# EAGLE board PCB_2D (EAGLE 9.7.0)
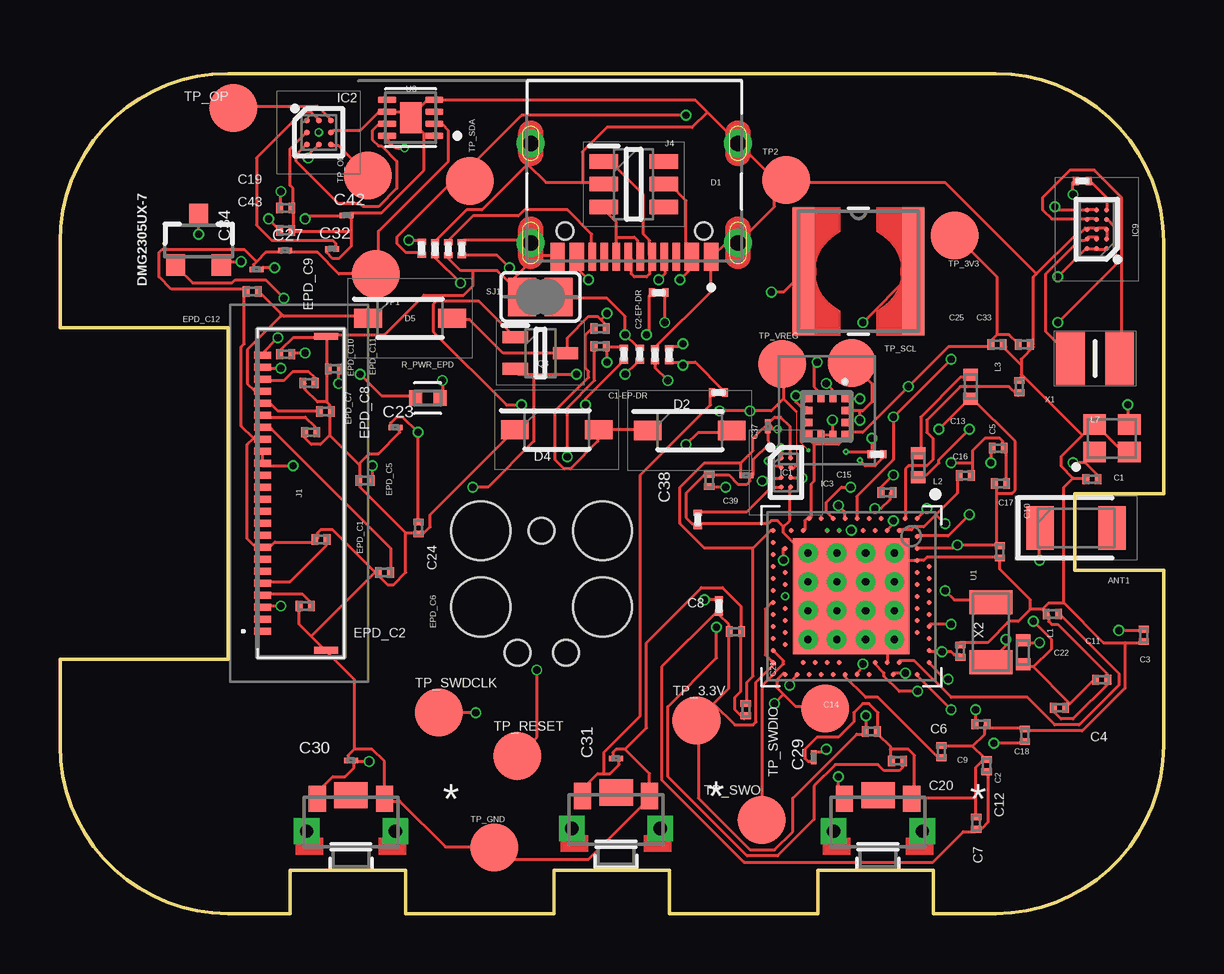
[diagram p0: board, top side]
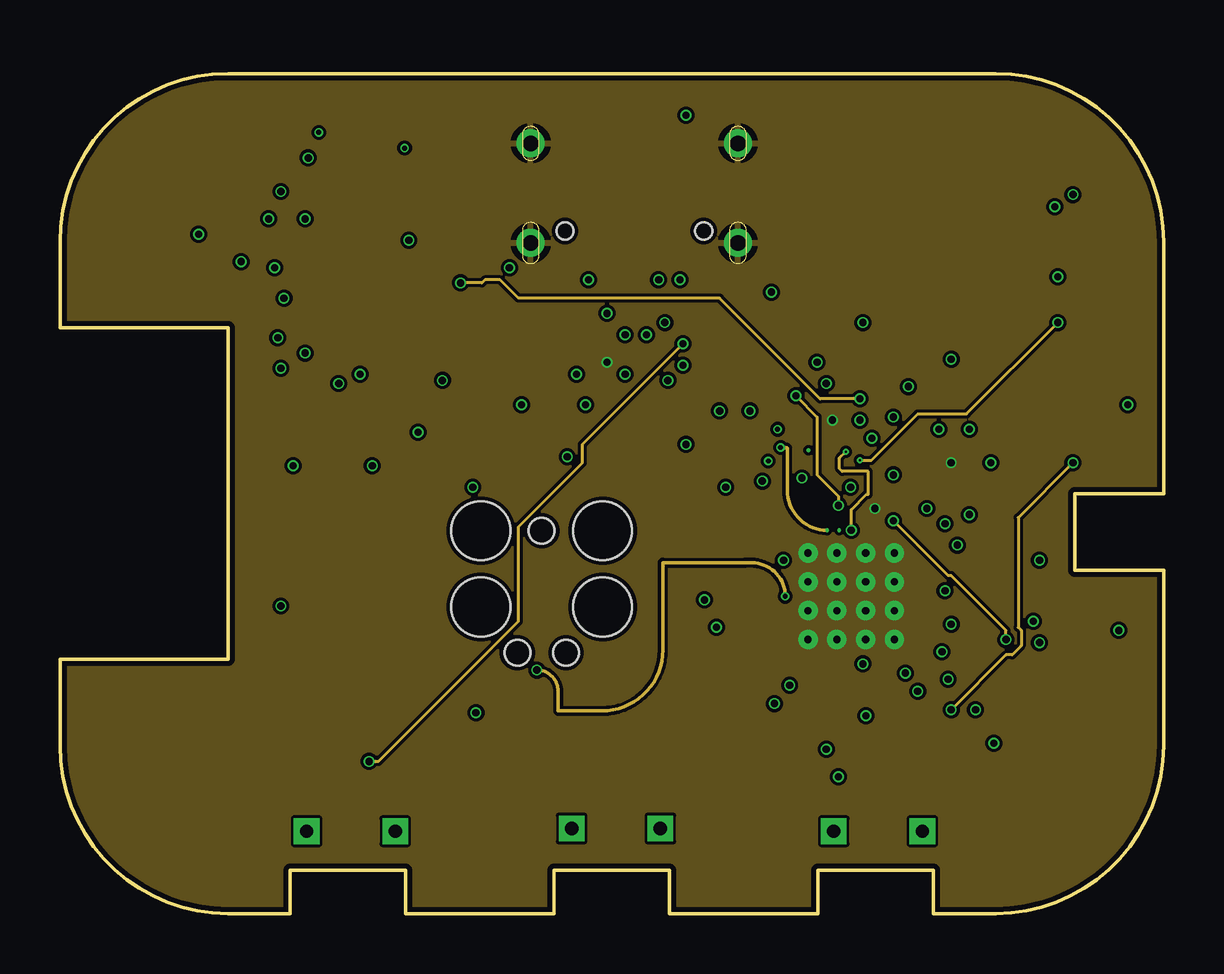
[diagram p1: board, inner layer Route2]
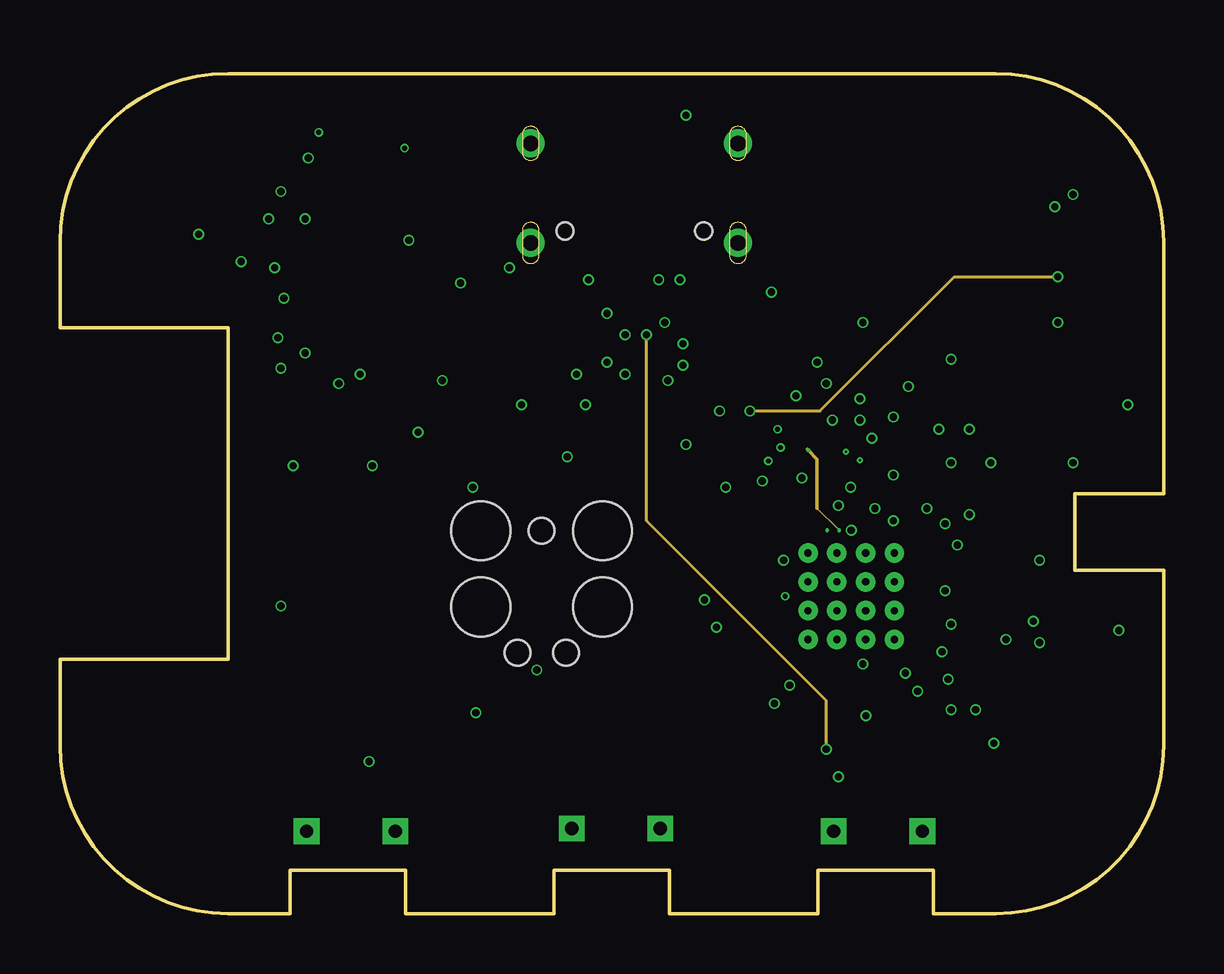
[diagram p2: board, inner layer Route15]
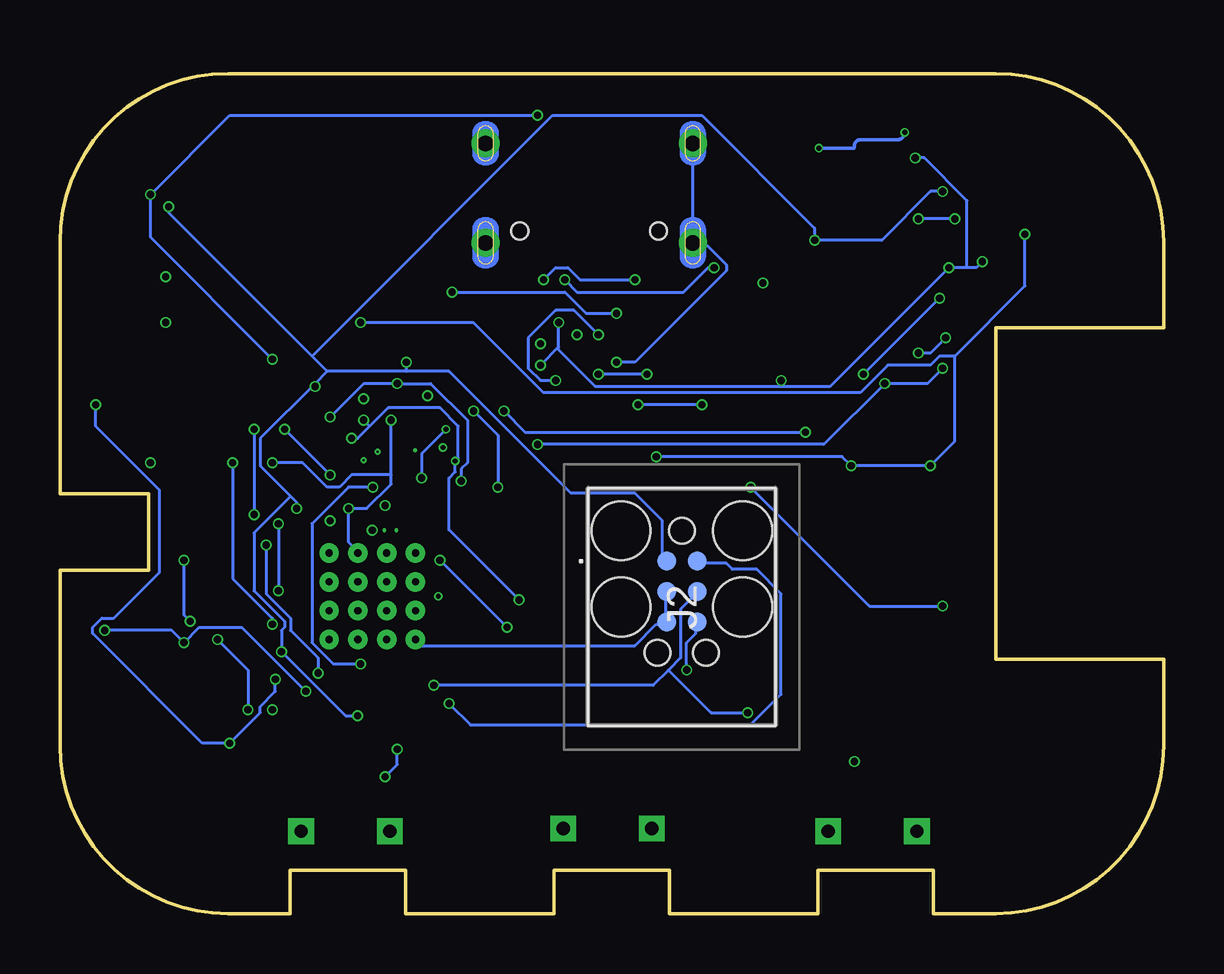
[diagram p3: board, bottom side, seen from below]

Size 46 x 35 mm. Coordinates in mm from the lower left corner, seen from the top.
Outline: 39,0 36.4,0 36.4,1.8 31.6,1.8 31.6,0 25.4,0 25.4,1.8 20.6,1.8 20.6,0 14.4,0 14.4,1.8 9.6,1.8 9.6,0 7,0 arc-90 0,7 0,10.6 7,10.6 7,24.4 0,24.4 0,28 arc-90 7,35 39,35 arc-90 46,28 46,17.5 42.31,17.5 42.31,14.3 46,14.3 46,7 arc-90 39,0
Copper layers (1+2*15+16): Top 0.035mm / dielectric 1.6mm / Route2 0.035mm / dielectric 0.15mm / Route15 0.035mm / dielectric 0.2mm / Bottom 0.035mm
Design rules "jlcpcb-2layers.dru *": minimum track width 5mil, minimum drill 0.3mm, track to track 5mil, track to pad 5mil, pad to pad 5mil, via to via 5mil, smd to smd 5mil, copper to edge 0.2mm, drill to drill 6mil, minimum pad ring 10mil, minimum via ring 3mil, stop-mask expansion 4mil, vias tented up to drill 0mil, thermal gap 10mil

## Footprints (pad centres in the part's own frame; a part is rotated, then mirrored left to right if it is on the bottom)
2450AT18B100E_ANTC3216X140N = smd 1.15 x 1.8: 1 -1.5,0; 2 1.5,0
NORDIC_NRF_3_RESC0201_L = smd 0.28 x 0.43: 1 -0.255,0; 2 0.255,0
GRM011R60J152KE01L_2_CAPC0201X13N = smd 0.22 x 0.23: 1 -0.185,0; 2 0.185,0
ESP32_C6_LIBRARY_3_SOT95P280X145-6N = smd 1.2 x 0.6: 1 -1.25,0.95; 2 -1.25,0; 3 -1.25,-0.95; 4 1.25,-0.95; 5 1.25,0; 6 1.25,0.95
ESP32_C6_LIBRARY_5_SOD3716X135N = smd 1.15 x 0.8: 1 -1.75,0; 2 1.75,0
ESP32_C6_LIBRARY_4_ESP32_C6_LIBRARY_4_ESP32_C6_LIBRARY_4_ESP32_C6_LIBRARY_4_ESP32_WROVER_SPARKFUN-DISCRETESEMI_SOT23-3 = smd 0.8 x 0.9: 1 -0.95,-1; 2 0.95,-1; 3 0,1.1
BQ25180YBGR_BGA8C40P2X4_100X155X50 = smd 0.2 x 0.2: A1 -0.2,0.6; A2 0.2,0.6; B1 -0.2,0.2; B2 0.2,0.2; C1 -0.2,-0.2; C2 0.2,-0.2; D1 -0.2,-0.6; D2 0.2,-0.6
DRV2605YZFR_BGA9C50P3X3_144X144X62 = smd 0.25 x 0.25: A1 -0.5,0.5; A2 0,0.5; A3 0.5,0.5; B1 -0.5,0; B2 0,0; B3 0.5,0; C1 -0.5,-0.5; C2 0,-0.5; C3 0.5,-0.5
BMA423_BMA423 = smd 0.3 x 0.35: 1 -0.75,-0.775; 2 -0.25,-0.775; 3 0.25,-0.775; 4 0.75,-0.775; 7 0.75,0.775; 8 0.25,0.775; 9 -0.25,0.775; 10 -0.75,0.775 | smd 0.35 x 0.3: 5 0.775,-0.25; 6 0.775,0.25; 11 -0.775,0.25; 12 -0.775,-0.25
RT6160AWSC_BGA15C40P3X5_140X230X60 = smd 0.216 x 0.216: A1 -0.4,0.8; A2 0,0.8; A3 0.4,0.8; B1 -0.4,0.4; B2 0,0.4; B3 0.4,0.4; C1 -0.4,0; C2 0,0; C3 0.4,0; D1 -0.4,-0.4; D2 0,-0.4; D3 0.4,-0.4; E1 -0.4,-0.8; E2 0,-0.8; E3 0.4,-0.8
503480-2400_5034802400 = smd 0.3 x 0.7: 1 -5.75,1.525; 2 -5.25,1.525; 3 -4.75,1.525; 4 -4.25,1.525; 5 -3.75,1.525; 6 -3.25,1.525; 7 -2.75,1.525; 8 -2.25,1.525; 9 -1.75,1.525; 10 -1.25,1.525; 11 -0.75,1.525; 12 -0.25,1.525; 13 0.25,1.525; 14 0.75,1.525; 15 1.25,1.525; 16 1.75,1.525; 17 2.25,1.525; 18 2.75,1.525; 19 3.25,1.525; 20 3.75,1.525; 21 4.25,1.525; 22 4.75,1.525; 23 5.25,1.525; 24 5.75,1.525 | smd 0.3 x 1: MP1 -6.54,-1.125; MP2 6.54,-1.125
TC2030-IDC_TC2030IDC = smd 0.783 x 0.783: 1 -0.953,-0.635; 2 -0.953,0.635; 3 0.317,-0.635; 4 0.317,0.635; 5 1.588,-0.635; 6 1.588,0.635 | hole 2.451: -2.223,-2.54; -2.223,2.54; 0.952,-2.54; 0.952,2.54 | hole 1.067: -2.223,0; 2.857,-1.016; 2.857,1.016
KH-TYPE-C-16P_KINGHELM_KH-TYPE-C-16P = smd 0.6 x 1.15: A1_B12 -3.2,4.725; A4_B9 -2.4,4.725; A9_B4 2.4,4.725; A12_B1 3.2,4.725 | smd 0.3 x 1.15: A5 -1.25,4.725; A6 -0.25,4.725; A7 0.25,4.725; A8 1.25,4.725; B5 1.75,4.725; B6 0.75,4.725; B7 -0.75,4.725; B8 -1.75,4.725 | drill 0.65 pad 1.05: SH1 -4.32,0; SH2 4.32,0; SH3 -4.32,4.15; SH4 4.32,4.15 | hole 0.7: -2.89,3.65; 2.89,3.65
NORDIC_NRF_2_RESC0402_L = smd 0.5 x 0.6: 1 -0.5,0; 2 0.5,0
ESP32_C6_LIBRARY_2_IND_4828-WE-TPC_WRE = smd 0.9 x 5.3: 1 -2.286,0; 2 2.286,0
MLP2016SR47MT0S1_INDC2016X100N = smd 1.2 x 2.2: 1 -1.028,0; 2 1.028,0
ESP32_C6_LIBRARY_6_SOT65P210X110-3N = smd 1.05 x 0.5: 1 -1.05,0.65; 2 -1.05,-0.65; 3 1.05,0
CPF0201D7K68C1_0201 = smd 0.35 x 0.25: 1 0,0.275; 2 0,-0.275
RESC1005X40 = smd 0.535 x 0.644: 1 -0.507,0; 2 0.507,0
ESP32_C6_LIBRARY_7_JUMPER_SJ = smd 1.168 x 1.6: 1 -0.762,0; 2 0.762,0
2025-10-22_07-23-44_LIBRARY_SW_EVP-AKE31A_PAN = smd 0.711 x 1.092: 1 -1.4,-0.972; 2 1.4,-0.972 | drill 0.559 pad 0.914 square: 3 -1.848,0.381; 4 1.848,0.381 | smd 1.397 x 1.092: 5 0,-1.124
HECTOR_WATCH_1_TP20R = smd 2 x 2: TP 0,0
NORDIC_NRF_4_AQFN50P700X700X85_HS-74N = smd 4.85 x 4.85: P$74 0,0 | drill 0.3 pad 0.6: P$75 -1.8,1.8; P$76 -0.6,1.8; P$77 0.6,1.8; P$78 1.8,1.8; P$79 -1.8,0.6; P$80 -0.6,0.6; P$81 0.6,0.6; P$82 1.8,0.6; P$83 -1.8,-0.6; P$84 -0.6,-0.6; P$85 0.6,-0.6; P$86 1.8,-0.6; P$87 -1.8,-1.8; P$88 -0.6,-1.8; P$89 0.6,-1.8; P$90 1.8,-1.8 | smd 0.2 x 0.2: P$A8 -1.25,3.25; P$A10 -0.75,3.25; P$A12 -0.25,3.25; P$A14 0.25,3.25; P$A16 0.75,3.25; P$A18 1.25,3.25; P$A20 1.75,3.25; P$A22 2.25,3.25; P$A23 2.75,3.25; P$AA24 3.25,-2.25; P$AB2 -2.75,-2.5; P$AC5 -2,-2.75; P$AC9 -1,-2.75; P$AC11 -0.5,-2.75; P$AC13 0,-2.75; P$AC15 0.5,-2.75; P$AC17 1,-2.75; P$AC19 1.5,-2.75; P$AC21 2,-2.75; P$AC24 3.25,-2.75; P$AD2 -2.75,-3.25; P$AD4 -2.25,-3.25; P$AD6 -1.75,-3.25; P$AD8 -1.25,-3.25; P$AD10 -0.75,-3.25; P$AD12 -0.25,-3.25; P$AD14 0.25,-3.25; P$AD16 0.75,-3.25; P$AD18 1.25,-3.25; P$AD20 1.75,-3.25; P$AD22 2.25,-3.25; P$AD23 2.75,-3.25; P$B1 -3.25,2.75; P$B3 -2.5,2.75; P$B5 -2,2.75; P$B7 -1.5,2.75; P$B9 -1,2.75; P$B11 -0.5,2.75; P$B13 0,2.75; P$B15 0.5,2.75; P$B17 1,2.75; P$B19 1.5,2.75; P$B24 3.25,2.75; P$C1 -3.25,2.25; P$D2 -2.75,2; P$D23 2.75,2; P$E24 3.25,1.75; P$F2 -2.75,1.5; P$F23 2.75,1.5; P$G1 -3.25,1.25; P$H2 -2.75,1; P$H23 2.75,1; P$J1 -3.25,0.75; P$J24 3.25,0.75; P$K2 -2.75,0.5; P$L1 -3.25,0.25; P$L24 3.25,0.25; P$M2 -2.75,0; P$N1 -3.25,-0.25; P$N24 3.25,-0.25; P$P2 -2.75,-0.5; P$P23 2.75,-0.5; P$R1 -3.25,-0.75; P$R24 3.25,-0.75; P$T2 -2.75,-1; P$T23 2.75,-1; P$U1 -3.25,-1.25; P$U24 3.25,-1.25; P$V23 2.75,-1.5; P$W1 -3.25,-1.75; P$W24 3.25,-1.75; P$Y2 -2.75,-2; P$Y23 2.75,-2
ESP32_C6_LIBRARY_SON50P200X200X80-9N = smd 0.76 x 0.27: 1 -0.985,0.75; 2 -0.985,0.25; 3 -0.985,-0.25; 4 -0.985,-0.75; 5 0.985,-0.75; 6 0.985,-0.25; 7 0.985,0.25; 8 0.985,0.75 | smd 0.9 x 1.3: 9 0,0
NORDIC_NRF_BT-XTAL_2016_N = smd 0.95 x 0.85: 1 -0.725,-0.575; 2 0.725,-0.575; 3 0.725,0.575; 4 -0.725,0.575
NORDIC_NRF_1_XTAL_3215_N = smd 1 x 1.8: 1 -1.25,0; 2 1.25,0

## Placement (x,y rotation side)
ANT1  2450AT18B100E  [2450AT18B100E_ANTC3216X140N]  42.35,16.06 0 top
C1  12pF  [NORDIC_NRF_3_RESC0201_L]  43.02,18.1 180 top
C1-EP-DR  10uF  [NORDIC_NRF_3_RESC0201_L]  22.52,23.63 0 top
C2  12pF  [NORDIC_NRF_3_RESC0201_L]  40.22,7.43 90 top
C2-EP-DR  4.7uF/25V  [NORDIC_NRF_3_RESC0201_L]  22.52,24.37 0 top
C3  1pF  [NORDIC_NRF_3_RESC0201_L]  45.17,11.59 270 top
C4  1pF  [NORDIC_NRF_3_RESC0201_L]  41.66,8.57 180 top
C5  100nF  [NORDIC_NRF_3_RESC0201_L]  39.99,21.96 90 top
C6  4.7μF  [NORDIC_NRF_3_RESC0201_L]  37.53,10.93 90 top
C7  100nF  [NORDIC_NRF_3_RESC0201_L]  38.19,3.77 90 top
C8  100nF  [NORDIC_NRF_3_RESC0201_L]  28.16,11.75 0 top
C9  820pF  [NORDIC_NRF_3_RESC0201_L]  36.74,6.74 90 top
C10  N.C  [NORDIC_NRF_3_RESC0201_L]  39.18,15.07 270 top
C11  100pF  [NORDIC_NRF_3_RESC0201_L]  41.36,12.48 180 top
C12  100nF  [NORDIC_NRF_3_RESC0201_L]  38.62,6.16 90 top
C13  N.C  [NORDIC_NRF_3_RESC0201_L]  39.1,19.39 0 top
C14  4.7μH  [NORDIC_NRF_3_RESC0201_L]  33.82,7.58 0 top
C15  1.0μF  [NORDIC_NRF_3_RESC0201_L]  34.47,17.54 0 top
C16  47nF  [NORDIC_NRF_3_RESC0201_L]  39.21,17.92 0 top
C17  12pF  [NORDIC_NRF_3_RESC0201_L]  37.73,18.25 180 top
C18  12pF  [NORDIC_NRF_3_RESC0201_L]  38.39,7.88 180 top
C19  100nF  [NORDIC_NRF_3_RESC0201_L]  9.41,29.4 0 top
C20  4.7μF  [NORDIC_NRF_3_RESC0201_L]  34.91,6.36 180 top
C21  4.7μF  [NORDIC_NRF_3_RESC0201_L]  28.59,8.49 270 top
C22  N.C  [NORDIC_NRF_3_RESC0201_L]  43.42,9.74 0 top
C23  0.1uF  [GRM011R60J152KE01L_2_CAPC0201X13N]  13.98,20.25 0 top
C24  10uF  [NORDIC_NRF_3_RESC0201_L]  14.95,16.06 90 top
C25  22uF  [NORDIC_NRF_3_RESC0201_L]  39.05,23.71 0 top
C27  0.1uF  [GRM011R60J152KE01L_2_CAPC0201X13N]  9.39,27.62 0 top
C29  1uF  [GRM011R60J152KE01L_2_CAPC0201X13N]  31.41,6.51 90 top
C30  1uF  [GRM011R60J152KE01L_2_CAPC0201X13N]  12.13,6.38 0 top
C31  1uF  [GRM011R60J152KE01L_2_CAPC0201X13N]  23.18,6.46 0 top
C32  1uF  [GRM011R60J152KE01L_2_CAPC0201X13N]  11.34,27.7 0 top
C33  22uF  [NORDIC_NRF_3_RESC0201_L]  40.2,23.71 0 top
C34  0.1uF  [GRM011R60J152KE01L_2_CAPC0201X13N]  8.19,26.83 0 top
C37  1uF  [GRM011R60J152KE01L_2_CAPC0201X13N]  29.5,20.31 90 top
C38  1uF  [GRM011R60J152KE01L_2_CAPC0201X13N]  28.61,18.25 0 top
C39  10uF  [NORDIC_NRF_3_RESC0201_L]  27.06,18.04 90 top
C42  0.1uF  [GRM011R60J152KE01L_2_CAPC0201X13N]  11.95,29.09 0 top
C43  4.7uF  [NORDIC_NRF_3_RESC0201_L]  9.41,28.46 0 top
D1  USBLC6-2SC6Y  [ESP32_C6_LIBRARY_3_SOT95P280X145-6N]  23.91,30.39 0 top
D2  MBR0530  [ESP32_C6_LIBRARY_5_SOD3716X135N]  26.25,20.13 0 top
D4  MBR0530  [ESP32_C6_LIBRARY_5_SOD3716X135N]  20.71,20.15 0 top
D5  MBR0530  [ESP32_C6_LIBRARY_5_SOD3716X135N]  14.59,24.8 0 top
DMG2305UX-7  20V/4.2A/52mΩ/1.4W  [ESP32_C6_LIBRARY_4_ESP32_C6_LIBRARY_4_ESP32_C6_LIBRARY_4_ESP32_C6_LIBRARY_4_ESP32_WROVER_SPARKFUN-DISCRETESEMI_SOT23-3]  5.78,28.03 0 top
EPD_C1  1uF/50V  [NORDIC_NRF_3_RESC0201_L]  10.88,15.58 0 top
EPD_C2  1uF/50V  [NORDIC_NRF_3_RESC0201_L]  10.22,12.81 0 top
EPD_C5  0.1uF/50V  [NORDIC_NRF_3_RESC0201_L]  12.71,18.04 0 top
EPD_C6  1uF/50V  [NORDIC_NRF_3_RESC0201_L]  13.53,14.21 0 top
EPD_C7  1uF/50V  [NORDIC_NRF_3_RESC0201_L]  10.45,20.05 0 top
EPD_C8  1uF/50V  [NORDIC_NRF_3_RESC0201_L]  11.06,20.91 180 top
EPD_C9  1uF/50V  [NORDIC_NRF_3_RESC0201_L]  8.01,25.92 0 top
EPD_C10  1uF/50V  [NORDIC_NRF_3_RESC0201_L]  10.38,22.11 0 top
EPD_C11  1uF/50V  [NORDIC_NRF_3_RESC0201_L]  11.44,22.69 0 top
EPD_C12  1uF/50V  [NORDIC_NRF_3_RESC0201_L]  9.41,23.3 0 top
IC1  BQ25180YBGR  [BQ25180YBGR_BGA8C40P2X4_100X155X50]  30.26,18.37 0 top
IC2  DRV2605YZFR  [DRV2605YZFR_BGA9C50P3X3_144X144X62]  10.78,32.55 0 top
IC3  BMA421  [BMA423_BMA423]  31.97,20.71 180 top
IC9  RT6160AWSC  [RT6160AWSC_BGA15C40P3X5_140X230X60]  43.22,28.51 180 top
J1  503480-2400  [503480-2400_5034802400]  9.97,17.51 90 top
J2  TC2030-IDC  [TC2030-IDC_TC2030IDC]  20.08,13.73 270 bottom
J4  KH-TYPE-C-16P  [KH-TYPE-C-16P_KINGHELM_KH-TYPE-C-16P]  23.94,32.09 180 top
L1  3.9nH  [NORDIC_NRF_2_RESC0402_L]  40.15,10.88 270 top
L2  10μH  [NORDIC_NRF_2_RESC0402_L]  35.78,18.68 90 top
L3  15nH  [NORDIC_NRF_2_RESC0402_L]  37.96,21.96 270 top
L5  68uH  [ESP32_C6_LIBRARY_2_IND_4828-WE-TPC_WRE]  33.29,26.76 0 top
L7  FTC252012SR47MBCA  [MLP2016SR47MT0S1_INDC2016X100N]  43.14,23.12 0 top
Q3  SI1308EDL-T1-GE3  [ESP32_C6_LIBRARY_6_SOT65P210X110-3N]  20.03,23.35 0 top
R1_EP_DR  0.47  [CPF0201D7K68C1_0201]  24.17,23.3 0 top
R1_USB  5K1  [CPF0201D7K68C1_0201]  16.75,27.7 0 top
R2  0  [CPF0201D7K68C1_0201]  42.61,30.52 90 top
R2_EP_DR  10K  [CPF0201D7K68C1_0201]  23.51,23.3 0 top
R2_USB  5K1  [CPF0201D7K68C1_0201]  16.19,27.7 0 top
R3  0  [CPF0201D7K68C1_0201]  15.63,27.7 0 top
R4  0  [CPF0201D7K68C1_0201]  34.05,19.14 90 top
R5  10K  [CPF0201D7K68C1_0201]  25.39,23.28 0 top
R7  10K  [CPF0201D7K68C1_0201]  24.96,25.87 90 top
R8  10K  [CPF0201D7K68C1_0201]  27.45,21.7 90 top
R9  10K  [CPF0201D7K68C1_0201]  26.58,16.42 180 top
R17  3K3  [CPF0201D7K68C1_0201]  27.47,12.81 180 top
R18  3K3  [CPF0201D7K68C1_0201]  15.08,27.72 0 top
R_PWR_EPD  10K  [RESC1005X40]  15.33,21.47 0 top
R_TYPE_SEL  2.2  [CPF0201D7K68C1_0201]  24.8,23.28 0 top
SJ1  [ESP32_C6_LIBRARY_7_JUMPER_SJ]  20.03,25.69 0 top
SW_DN  2025-10-22_07-23-44_LIBRARY_EVP-AKE31ASW_EVP-AKE31A_PAN  [2025-10-22_07-23-44_LIBRARY_SW_EVP-AKE31A_PAN]  34.1,3.81 180 top
SW_ENT  2025-10-22_07-23-44_LIBRARY_EVP-AKE31ASW_EVP-AKE31A_PAN  [2025-10-22_07-23-44_LIBRARY_SW_EVP-AKE31A_PAN]  23.18,3.92 180 top
SW_UP  2025-10-22_07-23-44_LIBRARY_EVP-AKE31ASW_EVP-AKE31A_PAN  [2025-10-22_07-23-44_LIBRARY_SW_EVP-AKE31A_PAN]  12.13,3.81 180 top
TP1  HECTOR_WATCH_1_TPTP20R  [HECTOR_WATCH_1_TP20R]  13.17,26.66 180 top
TP2  HECTOR_WATCH_1_TPTP20R  [HECTOR_WATCH_1_TP20R]  30.26,30.57 0 top
TP_3.3V  HECTOR_WATCH_1_TPTP20R  [HECTOR_WATCH_1_TP20R]  26.53,8.04 0 top
TP_3V3  HECTOR_WATCH_1_TPTP20R  [HECTOR_WATCH_1_TP20R]  37.3,28.26 180 top
TP_GND  HECTOR_WATCH_1_TPTP20R  [HECTOR_WATCH_1_TP20R]  18.1,2.75 0 top
TP_ON  HECTOR_WATCH_1_TPTP20R  [HECTOR_WATCH_1_TP20R]  12.84,30.74 0 top
TP_OP  TP_OP  [HECTOR_WATCH_1_TP20R]  7.23,33.56 0 top
TP_RESET  HECTOR_WATCH_1_TPTP20R  [HECTOR_WATCH_1_TP20R]  19.06,6.56 0 top
TP_SCL  HECTOR_WATCH_1_TPTP20R  [HECTOR_WATCH_1_TP20R]  33.01,22.95 0 top
TP_SDA  HECTOR_WATCH_1_TPTP20R  [HECTOR_WATCH_1_TP20R]  17.08,30.52 0 top
TP_SWDCLK  HECTOR_WATCH_1_TPTP20R  [HECTOR_WATCH_1_TP20R]  15.79,8.37 0 top
TP_SWDIO  HECTOR_WATCH_1_TPTP20R  [HECTOR_WATCH_1_TP20R]  31.89,8.54 0 top
TP_SWO  HECTOR_WATCH_1_TPTP20R  [HECTOR_WATCH_1_TP20R]  29.25,3.9 0 top
TP_VREG  HECTOR_WATCH_1_TPTP20R  [HECTOR_WATCH_1_TP20R]  30.11,22.9 0 top
U1  NRF52840_QF  [NORDIC_NRF_4_AQFN50P700X700X85_HS-74N]  32.98,13.22 270 top
U3  MAX17048G+T10  [ESP32_C6_LIBRARY_SON50P200X200X80-9N]  14.62,33.16 180 top
X1  32MHz  [NORDIC_NRF_BT-XTAL_2016_N]  43.85,19.8 0 top
X2  32.768kHz  [NORDIC_NRF_1_XTAL_3215_N]  38.8,11.72 90 top

## Library data of the parts
ANT1 = InkTime_v5; ARROW_PART_NUMBER: 2450AT18B100E; ARROW_PRICE-STOCK: https://www.arrow.com/en/products/2450at18b100e/johanson-dielectrics?utm_currency=USD&region=nac; DESCRIPTION: Antennas 2.45GHz ANTENNA; HEIGHT: 1.4mm; MANUFACTURER_NAME: JOHANSON TECHNOLOGY; MANUFACTURER_PART_NUMBER: 2450AT18B100E; MOUSER_PART_NUMBER: 609-2450AT18B100E; MOUSER_PRICE-STOCK: https://www.mouser.co.uk/ProductDetail/Johanson-Technology/2450AT18B100E?qs=yCnrNFeXz%252Bh5MFsFIXGZGA%3D%3D
C1 C1-EP-DR C2 C2-EP-DR C3-C22 C24 C25 C33 C39 C43 EPD_C1 EPD_C2 EPD_C5-EPD_C12 L1-L3 R1_EP_DR R1_USB R2 R2_EP_DR R2_USB R3-R5 R7-R9 R17 R18 R_TYPE_SEL SJ1 TP1 TP2 TP_3.3V TP_3V3 TP_GND TP_ON TP_OP TP_RESET TP_SCL TP_SDA TP_SWDCLK TP_SWDIO TP_SWO TP_VREG U1 X1 X2 = InkTime_v5
C23 C27 C29-C32 C34 C37 C38 C42 = InkTime_v5; AVAILABILITY: In Stock; CHECK_PRICES: https://www.snapeda.com/parts/GRM011R60J152KE01L/Murata/view-part/?ref=eda; DESCRIPTION: SMD Capacitor X5R(EIA) with Capacitance: 1500pF Tol. 10%. Rated Voltage: 6.3Vdc; MF: Murata; MP: GRM011R60J152KE01L; PACKAGE: 0201 Murata; PRICE: None; SNAPEDA_LINK: https://www.snapeda.com/parts/GRM011R60J152KE01L/Murata/view-part/?ref=snap
D1 = InkTime_v5; AVAILABILITY: In Stock; CHECK_PRICES: https://www.snapeda.com/parts/USBLC6-2SC6Y/STMicroelectronics/view-part/?ref=eda; DESCRIPTION: 17V Clamp 5A (8/20µs) Ipp Tvs Diode Surface Mount SOT-23-6; MF: STMicroelectronics; MP: USBLC6-2SC6Y; PACKAGE: SOT-23-6 STMicroelectronics; PRICE: None; SNAPEDA_LINK: https://www.snapeda.com/parts/USBLC6-2SC6Y/STMicroelectronics/view-part/?ref=snap
D2 D4 D5 = InkTime_v5; AVAILABILITY: In Stock; CHECK_PRICES: https://www.snapeda.com/parts/MBR0530/Onsemi/view-part/?ref=eda; DESCRIPTION: Diode Schottky 30 V 500mA Surface Mount SOD-123; MF: ON Semiconductor; MP: MBR0530; PACKAGE: SOD-123-2 ON Semiconductor; PRICE: None; PURCHASE-URL: https://www.snapeda.com/api/url_track_click_mouser/?unipart_id=179458&manufacturer=ON Semiconductor&part_name=MBR0530&search_term=None; SNAPEDA_LINK: https://www.snapeda.com/parts/MBR0530/Onsemi/view-part/?ref=snap
DMG2305UX-7 = InkTime_v5; PROD_ID: TRAN-14388
IC1 = InkTime_v5; ARROW_PART_NUMBER: BQ25180YBGR; ARROW_PRICE-STOCK: https://www.arrow.com/en/products/bq25180ybgr/texas-instruments?utm_currency=USD&region=nac; DESCRIPTION: Charger IC Lithium Ion/Polymer, Lithium Iron Phosphate 8-DSBGA (1.6x1.1); HEIGHT: 0.5mm; MANUFACTURER_NAME: Texas Instruments; MANUFACTURER_PART_NUMBER: BQ25180YBGR; MOUSER_PART_NUMBER: 595-BQ25180YBGR; MOUSER_PRICE-STOCK: https://www.mouser.co.uk/ProductDetail/Texas-Instruments/BQ25180YBGR?qs=doiCPypUmgEWjAK%252BJAX6Tw%3D%3D
IC2 = InkTime_v5; ARROW_PART_NUMBER: DRV2605YZFR; ARROW_PRICE-STOCK: https://www.arrow.com/en/products/drv2605yzfr/texas-instruments?region=nac; DESCRIPTION: Haptic Driver for ERM/LRA with Built-In Library and Smart Loop Architecture; HEIGHT: 0.625mm; MANUFACTURER_NAME: Texas Instruments; MANUFACTURER_PART_NUMBER: DRV2605YZFR
IC3 = InkTime_v5; ARROW_PART_NUMBER: BMA423; ARROW_PRICE-STOCK: https://www.arrow.com/en/products/bma423/bosch; DESCRIPTION: Accelerometers Triaxial low-g 12bit Acceleration Sensor; HEIGHT: 1mm; MANUFACTURER_NAME: BOSCH; MANUFACTURER_PART_NUMBER: BMA423; MOUSER_PART_NUMBER: 262-BMA423; MOUSER_PRICE-STOCK: https://www.mouser.co.uk/ProductDetail/Bosch-Sensortec/BMA423?qs=HXFqYaX1Q2xC%252BSgeGoX3mg%3D%3D
IC9 = InkTime_v5; DESCRIPTION: Buck-Boost Regulator Positive Output Step-Up/Step-Down I2C DC-DC Controller IC 15-WL-CSP (BSC) (1.4x2.3); HEIGHT: 0.6mm; MANUFACTURER_NAME: RICHTEK; MANUFACTURER_PART_NUMBER: RT6160AWSC; MOUSER_PART_NUMBER: 835-RT6160AWSC; MOUSER_PRICE-STOCK: https://www.mouser.co.uk/ProductDetail/Richtek/RT6160AWSC?qs=amGC7iS6iy%2FLd9PSoixZXQ%3D%3D
J1 = InkTime_v5; DESCRIPTION: FFC & FPC Connectors 0.5mm FPC RA SMT Dual Contact 24Ckt; HEIGHT: 1.87mm; MANUFACTURER_NAME: Molex; MANUFACTURER_PART_NUMBER: 503480-2400; MOUSER_PART_NUMBER: 538-503480-2400; MOUSER_PRICE-STOCK: https://www.mouser.co.uk/ProductDetail/Molex/503480-2400?qs=OAhjpuo3Vu7efIoxFh9AOw%3D%3D
J2 = InkTime_v5; DESCRIPTION: CABLE ADAPTER 6 POS; HEIGHT: 19mm; MANUFACTURER_NAME: Tag Connect; MANUFACTURER_PART_NUMBER: TC2030-IDC
J4 = InkTime_v5; AVAILABILITY: Not in stock; CHECK_PRICES: https://www.snapeda.com/parts/KH-TYPE-C-16P/Kinghelm/view-part/?ref=eda; MF: kinghelm; MP: KH-TYPE-C-16P; PACKAGE: None; PRICE: None; SNAPEDA_LINK: https://www.snapeda.com/parts/KH-TYPE-C-16P/Kinghelm/view-part/?ref=snap
L5 = InkTime_v5; COPYRIGHT: Copyright (C) 2024 Ultra Librarian. All rights reserved.; MANUFACTURER_PART_NUMBER: 744043680; MFR_NAME: Wurth Electronics
L7 = InkTime_v5; DESCRIPTION: SMD / SMT Inductors (Coils), L=0.47?H, L x W x T :; HEIGHT: 1mm; JLCPCB: https://jlcpcb.com/partdetail/6763488-FTC252012SR47MBCA/C5832368; MANUFACTURER_NAME: TDK; MANUFACTURER_PART_NUMBER: FTC252012SR47MBCA
Q3 = InkTime_v5; AVAILABILITY: In Stock; CHECK_PRICES: https://www.snapeda.com/parts/SI1308EDL-T1-GE3/Vishay+Siliconix/view-part/?ref=eda; DESCRIPTION: Si1308EDL-T1-GE3 N-channel MOSFET Transistor, 1.5 A, 30 V, 3-Pin SC-70 | Siliconix / Vishay SI1308EDL-T1-GE3; MF: Vishay Siliconix; MP: SI1308EDL-T1-GE3; PACKAGE: SOT-323 Vishay Semiconductor; PRICE: None; PURCHASE-URL: https://www.snapeda.com/api/url_track_click_mouser/?unipart_id=274603&manufacturer=Vishay Siliconix&part_name=SI1308EDL-T1-GE3&search_term=None; SNAPEDA_LINK: https://www.snapeda.com/parts/SI1308EDL-T1-GE3/Vishay+Siliconix/view-part/?ref=snap
R_PWR_EPD = Tinkercad; CATEGORY: Resistor; SUB-CATEGORY: Fixed
SW_DN SW_ENT SW_UP = InkTime_v5; COPYRIGHT: Copyright (C) 2025 Ultra Librarian. All rights reserved.; DIGI-KEY_PART_NUMBER_1: P123437TR-ND; DIGI-KEY_PART_NUMBER_2: P123437CT-ND; DIGI-KEY_PART_NUMBER_3: P123437DKR-ND; MANUFACTURER_NAME: Panasonic; MANUFACTURER_PART_NUMBER: EVP-AKE31A
U3 = InkTime_v5; AVAILABILITY: In Stock; CHECK_PRICES: https://www.snapeda.com/parts/MAX17048G+T10/Analog+Devices/view-part/?ref=eda; DESCRIPTION: 3µA 1-Cell/2-Cell Fuel Gauge with ModelGauge; MF: Analog Devices; MP: MAX17048G+T10; PACKAGE: TDFN-8 Maxim; PRICE: None; PURCHASE-URL: https://www.snapeda.com/api/url_track_click_mouser/?unipart_id=329239&manufacturer=Analog Devices&part_name=MAX17048G+T10&search_term=None; SNAPEDA_LINK: https://www.snapeda.com/parts/MAX17048G+T10/Analog+Devices/view-part/?ref=snap

## Nets
3V3/1.7D: C34.2 DMG2305UX-7.2 IC2.C2 R5.2 R7.2 R8.2 R_PWR_EPD.2
3V3/2.4A: C6.1 C7.1 C8.1 C12.1 C14.1 C19.1 C25.1 C33.1 IC3.3 IC3.7 IC3.10 IC9.E2 IC9.E3 J2.1 R17.1 R18.1 TP_3.3V.TP TP_3V3.TP U1.P$A22 U1.P$AD14 U1.P$AD23 U1.P$B1 U1.P$W1 U1.P$Y2
ALERT/1.6C: U3.5
ALERT/2.5C: U1.P$J24
D+/1.5D: D1.4
D+/2.7D: U1.P$AD6
D-/1.5D: D1.6
D-/2.7D: U1.P$AD4
DEC1: C5.1 U1.P$C1
DEC3: C11.1 U1.P$D23
DEC4_6: C10.1 C15.1 C16.1 L3.2 U1.P$B5 U1.P$E24
DN: D1.1 J4.A7 J4.B7
DP: D1.3 J4.A6 J4.B6
EPD_3V3: C1-EP-DR.1 DMG2305UX-7.3 EPD_C5.2 J1.15 J1.16 L5.2
EPD_BUSY/1.5D: J1.9
EPD_BUSY/2.2D: U1.P$AD12
EPD_CS/1.4C: J1.12
EPD_CS/2.2D: U1.P$K2
EPD_DC/1.5D: J1.11
EPD_DC/2.2D: U1.P$AD10
EPD_RST/1.5D: J1.10
EPD_RST/2.2D: U1.P$AC11
GDR: J1.2
GND: C1-EP-DR.2 C1.2 C2.2 C3.2 C4.2 C5.2 C6.2 C7.2 C8.2 C9.2 C10.2 C11.2 C12.2 C13.2 C14.2 C15.2 C16.2 C17.1 C18.1 C19.2 C20.2 C21.2 C22.2 C23.2 C24.1 C25.2 C27.1 C29.1 C30.1 C31.1 C32.1 C33.2 C34.1 C37.1 C38.2 C39.2 C42.2 C43.2 D1.2 D4.1 EPD_C1.1 EPD_C2.1 EPD_C5.1 EPD_C6.1 EPD_C7.1 EPD_C8.1 EPD_C9.1 EPD_C10.1 EPD_C11.1 EPD_C12.1 IC1.D2 IC2.B1 IC2.B3 IC3.8 IC3.9 IC9.B1 IC9.C1 IC9.C2 IC9.C3 J1.8 J1.17 J1.MP1 J1.MP2 J2.3 J2.5 J4.A1_B12 J4.A12_B1 J4.SH1 J4.SH2 J4.SH3 J4.SH4 R1_USB.1 R2_EP_DR.1 R2_USB.2 R3.1 R9.1 R_TYPE_SEL.1 SJ1.1 SW_DN.1 SW_ENT.1 SW_UP.1 TP2.TP TP_GND.TP U1.P$74 U1.P$75 U1.P$76 U1.P$77 U1.P$78 U1.P$79 U1.P$80 U1.P$81 U1.P$82 U1.P$83 U1.P$84 U1.P$85 U1.P$86 U1.P$87 U1.P$88 U1.P$89 U1.P$90 U1.P$B7 U1.P$F23 U3.1 U3.4 U3.6 U3.9 X1.2 X1.4
HAPTIC_EN/1.4C: IC2.A1
HAPTIC_EN/2.6A: U1.P$U1
IMU_INT1: IC3.5 U1.P$N1
IMU_INT2: IC3.6 U1.P$P2
LX1: IC9.B2 IC9.B3 L7.1
LX2: IC9.D2 IC9.D3 L7.2
MOSI/1.5B: J1.14
MOSI/2.2D: U1.P$B13
N$1: C2-EP-DR.2 D5.2 L5.1 Q3.3
N$2: C2-EP-DR.1 D2.1 D4.2
N$3: Q3.1 R2_EP_DR.2
N$4: R1_EP_DR.1 R_TYPE_SEL.2 SJ1.2
N$5: C42.1 C43.1
N$6: C32.2 IC2.A2
N$7: IC1.D1 R9.2
N$8: J4.A5 R1_USB.2
N$9: IC3.1 R3.2
N$10: EPD_C2.2 J1.4
N$11: EPD_C1.2 J1.5
N$12: IC9.D1 R4.2
N$13: IC9.E1 R2.2
N$14: J4.B5 R2_USB.1
N$17: C20.1 U1.P$AC5
N$19: EPD_C6.2 J1.18
N$21: EPD_C7.2 J1.19
N$22: EPD_C8.2 J1.20
N$24: EPD_C10.2 J1.22
N$26: EPD_C12.2 J1.24
N$46: C9.1 U1.P$N24
N$49: C3.1 L1.1 U1.P$H23
N$51: C2.1 U1.P$A23 X1.3
N$52: C1.1 U1.P$B24 X1.1
N$58: C13.1 U1.P$A18
N$69: L2.1 U1.P$B3
N$70: L2.2 L3.1
OUT+: IC2.A3 TP_OP.TP
OUT-: IC2.C3 TP_ON.TP
P0.00/XL1: C17.2 U1.P$D2 X2.2
P0.01/XL2: C18.2 U1.P$F2 X2.1
P0.04: U1.P$J1
P0.13/1.5D: C30.2 R5.1 SW_UP.2
P0.13/2.6C: U1.P$AD8
P0.14/1.5D: C31.2 R8.1 SW_ENT.2
P0.14/2.7C: U1.P$AC9
P0.19: U1.P$AC15
P0.20: U1.P$AD16
P0.21: U1.P$AC17
P0.22: U1.P$AD18
P0.23: U1.P$AC19
P0.24: U1.P$AD20
P0.25: U1.P$AC21
P0.26: U1.P$G1
P0.27: U1.P$H2
P0.28: U1.P$B11
P0.29: U1.P$A10
P0.30: U1.P$B9
P0.31: U1.P$A8
P1.01/1.6C: DMG2305UX-7.1 R_PWR_EPD.1
P1.01/2.4B: U1.P$Y23
P1.02/1.6C: C29.2 R7.1 SW_DN.2
P1.02/2.8C: U1.P$W24
P1.03: U1.P$V23
P1.04: U1.P$U24
P1.05: U1.P$T23
P1.06: U1.P$R24
P1.07: U1.P$P23
P1.09: U1.P$L24 U1.P$R1
P1.10: U1.P$A20
P1.11: U1.P$B19
P1.12: U1.P$B17
P1.13: U1.P$A16
P1.14: U1.P$B15
P1.15: U1.P$A14
PMIC_INT: IC1.A1 U1.P$T2
PREVGH: D5.1 EPD_C9.2 J1.21
PREVGL: D2.2 EPD_C11.2 J1.23
RESE: J1.3 Q3.2 R1_EP_DR.2
RESET: J2.6 TP_RESET.TP U1.P$AC13
RF: ANT1.1 C4.1 C22.1 L1.2
SCK/1.5B: J1.13
SCK/2.2D: U1.P$A12
SCL/1.4C: IC2.C1 U3.7
SCL/2.4C: IC1.B1 IC3.12 R4.1 R17.2 TP_SCL.TP U1.P$M2
SDA/1.4C: IC2.B2 U3.8
SDA/2.4C: IC1.C1 IC3.2 R2.1 R18.2 TP_SDA.TP U1.P$L1
SWDCLK: J2.4 TP_SWDCLK.TP U1.P$AA24
SWDIO: J2.2 TP_SWDIO.TP U1.P$AC24
SWO: TP_SWO.TP U1.P$AD22
VBAT/1.2A: C27.2 TP1.TP U3.2 U3.3
VBAT/2.5C: C37.2 IC1.C2
VBUS/1.5D: D1.5 J4.A4_B9 J4.A9_B4
VBUS/2.6D: C21.1 C38.1 IC1.A2 U1.P$AD2
VREG: C23.1 C24.2 C39.1 IC1.B2 IC9.A1 IC9.A2 IC9.A3 TP_VREG.TP

## Tracks (layer width: path | path; a pad name or v marks a point on that pad's centre or on a via)
3V3/1.7D  (via drill 0.3)
  Top 0.127: 25.97,22.97 25.46,22.97 R5.2 | 25.97,22.97 26.48,22.97 27.62,21.83 27.62,21.7 R8.2 | v8.95,26.91 8.45,26.91 C34.2 | v7.56,27.16 6.92,27.16 6.8,27.04 DMG2305UX-7.2 | v10.35,31.48 10.35,31.61 10.73,31.99 IC2.C2 | v25.21,24.62 25.21,25.77 R7.2 | v15.94,22.21 15.94,21.57 R_PWR_EPD.2 | v25.97,22.84 25.97,22.97
  Bottom 0.127: 8.19,26.91 7.81,26.91 v7.56,27.16 | 8.19,26.91 v8.95,26.91 13.91,21.96 15.94,21.96 | v10.35,31.48 9.97,31.48 8.19,29.7 8.19,26.91 | 25.21,23.61 25.21,23.48 23.69,21.96 15.94,21.96 | 25.21,23.61 v25.21,24.62 | 15.94,21.96 v15.94,22.21 | 25.21,23.61 v25.97,22.84
3V3/2.4A  (via drill 0.3)
  Top 0.127: C12.1 38.67,5.83 38.67,3.8 38.42,3.54 38.29,3.54 C7.1 38.16,3.41 37.66,3.41 36.39,2.14 28.51,2.14 25.08,5.57 25.08,10.27 27.37,12.56 R17.1 27.5,12.43 27.88,12.05 27.88,11.8 C8.1 27.88,11.67 27.88,9.38 27.24,8.75 | U1.P$AD14 29.66,12.94 29.4,12.69 29.4,10.78 29.66,10.53 U1.P$AD23 29.78,10.4 29.02,9.64 29.02,7.99 28.89,7.86 28.13,7.86 27.24,8.75 | 27.24,8.75 TP_3.3V.TP 26.61,7.99 26.61,4.81 28.77,2.65 29.78,2.65 30.54,3.41 30.54,4.81 33.21,7.48 33.47,7.48 C14.1 33.59,7.6 v33.59,8.24 | U1.P$Y2 31.05,15.99 31.05,16.37 31.18,16.49 U1.P$W1 31.31,16.49 31.31,17.89 31.43,18.02 31.43,19.54 | 31.43,19.54 31.31,19.67 31.31,19.92 IC3.7 | 31.43,19.54 32.45,19.54 32.83,19.92 IC3.10 32.83,20.05 33.47,20.05 v35.37,21.96 37.02,23.61 38.67,23.61 C25.1 38.8,23.73 38.8,23.86 39.05,24.12 | 39.05,24.12 39.56,24.12 39.94,23.73 C33.1 | 39.05,24.12 39.05,26.53 37.4,28.18 TP_3V3.TP | v14.54,28.05 15.05,28.05 R18.1 | v9.21,30.08 9.21,29.45 C19.1 | U1.P$A22 36.26,10.91 v36.77,10.91 37.15,10.91 37.27,10.78 37.53,10.78 C6.1 | IC9.E2 43.12,29.32 42.86,29.32 IC9.E3 42.74,29.32 41.59,29.32 v41.47,29.45 | v36.13,16.88 35.75,16.49 U1.P$B1 | v31.56,22.97 31.43,22.84 31.43,21.96 31.69,21.7 31.69,21.57 IC3.3
  Bottom 0.127: v9.21,30.08 9.72,30.08 11.75,28.05 v14.54,28.05 14.54,28.56 19.24,33.26 25.46,33.26 35.5,23.23 | v36.13,16.88 36.13,17.13 36.39,17.38 | 36.39,17.38 37.66,18.65 37.66,19.8 35.37,22.08 | 34.86,22.59 35.37,22.08 | 31.56,22.59 29.78,22.59 24.7,17.51 22.04,17.51 20.89,16.37 20.89,14.84 20.77,14.72 J2.1 | 31.56,22.59 34.86,22.59 | v41.47,29.45 41.47,29.19 35.5,23.23 | 34.86,22.59 35.5,23.23 | 31.56,22.59 v31.56,22.97 | 36.39,17.38 37.91,15.86 37.91,13.45 36.64,12.18 36.64,11.92 36.77,11.8 v36.77,10.91 34.1,8.24 v33.59,8.24 | 35.37,22.08 v35.37,21.96
DEC1
  Top 0.127: U1.P$C1 35.24,16.49 35.24,18.53 35.37,18.65 36.13,18.65 36.39,18.91 36.39,19.8 36.13,20.05 36.13,20.56 37.53,21.96 39.56,21.96 39.94,21.57 C5.1
DEC3
  Top 0.127: U1.P$D23 34.99,10.53 35.62,10.53 37.15,9 40.32,9 41.47,7.86 42.48,7.86 44.13,9.51 44.13,10.02 41.72,12.43 C11.1
DEC4_6  (via drill 0.3)
  Top 0.127: v34.73,18.27 34.23,17.77 34.23,17.64 C15.1 | v36.64,20.18 37.91,21.45 L3.2 38.04,21.45 39.81,19.67 39.81,17.64 39.69,17.51 39.05,17.51 | v35.24,10.02 34.73,10.02 U1.P$E24 | 39.05,15.35 39.18,15.35 C10.1 39.05,15.35 | 39.05,15.35 v37.4,15.35 37.27,15.22 35.75,15.22 U1.P$B5 | 39.05,15.35 39.05,17.51 | 39.05,17.51 39.05,17.89 C16.1
  Bottom 0.127: v36.64,20.18 v34.73,18.27 | v35.24,10.02 35.24,10.65 36.39,11.8 36.39,12.3 37.4,13.32 v37.4,15.35
DN
  Top 0.127: J4.A7 23.81,27.29 23.81,26.66 23.94,26.53 24.45,26.53 24.57,26.66 24.57,27.29 J4.B7 24.57,27.42 24.57,28.05 24.32,28.31 24.32,29.96 23.05,31.23 22.67,31.23 D1.1
DP
  Top 0.127: 23.18,28.18 23.18,28.81 22.67,29.32 D1.3 | 23.18,28.18 23.18,27.42 J4.B6 | 23.18,28.18 23.94,28.18 24.07,28.05 24.07,27.42 J4.A6
EPD_3V3  (via drill 0.3)
  Top 0.127: v13.02,18.65 13.02,18.15 EPD_C5.2 | v9.72,18.65 8.45,18.65 J1.15 8.45,18.78 8.45,19.16 J1.16 | v21.15,19.03 21.15,21.07 22.29,22.21 22.29,23.61 C1-EP-DR.1 | v5.78,28.31 DMG2305UX-7.3 | v33.47,24.62 35.5,26.66 L5.2
  Bottom 0.127: v21.15,19.03 13.4,19.03 v13.02,18.65 v9.72,18.65 8.7,19.67 8.7,23.23 | v5.78,28.31 5.78,26.15 8.7,23.23 | v33.47,24.62 28.77,24.62 25.85,21.7 12.64,21.7 11.49,22.84 9.72,22.84 9.34,23.23 8.7,23.23
GND  (via drill 0.3)
  Top 0.127: 38.04,18.78 38.04,19.29 38.55,19.8 39.18,19.8 39.31,19.67 39.31,19.42 C13.2 39.43,19.29 39.43,18.02 C16.2 | 38.04,18.78 38.04,18.27 C17.1 | IC3.8 31.81,19.92 32.2,19.92 IC3.9 32.2,20.05 v32.2,20.56 | v33.97,16.88 34.23,16.88 34.61,17.26 34.61,17.51 C15.2 | v37.15,18.78 38.04,18.78 | C37.1 29.54,19.56 28.89,18.91 28.89,18.27 C38.2 28.77,18.15 28.77,18.02 28.64,17.89 28.26,17.89 27.88,18.27 27.12,18.27 C39.2 26.99,18.4 26.1,17.51 26.1,16.49 26.35,16.24 26.48,16.24 R9.1 26.61,16.24 29.53,16.24 29.66,16.37 29.91,16.37 30.16,16.11 | 34.73,11.41 34.48,11.16 34.48,10.53 U1.P$F23 | 35.75,14.72 35.12,14.72 34.86,14.97 | 30.16,16.11 30.42,16.37 30.42,17.77 IC1.D2 | 30.16,16.11 30.16,15.86 30.93,15.1 31.18,15.1 | 31.18,13.7 31.18,12.69 U1.P$89 | 31.18,13.7 U1.P$88 | 31.18,13.7 U1.P$74 | 33.47,11.41 32.45,11.41 U1.P$86 32.32,11.41 31.31,11.41 U1.P$90 | U1.P$85 32.45,12.69 32.45,13.32 U1.P$74 | U1.P$84 32.45,13.83 U1.P$74 | 33.47,11.41 U1.P$82 | 33.47,11.41 U1.P$74 | U1.P$81 33.47,12.69 U1.P$74 | 33.59,13.83 U1.P$80 U1.P$74 | 34.73,11.41 U1.P$78 | 34.73,11.41 U1.P$74 | U1.P$77 34.73,12.56 34.23,12.05 34.1,12.05 U1.P$74 | 34.23,14.34 34.73,13.83 U1.P$76 | 31.18,15.1 U1.P$87 | 31.18,15.1 U1.P$74 | U1.P$83 32.32,14.97 31.81,14.46 U1.P$74 | 34.86,14.97 U1.P$75 | 34.86,14.97 U1.P$74 | 34.23,14.34 33.59,14.97 U1.P$79 | 34.23,14.34 U1.P$74 | 42.23,18.15 42.74,18.15 C1.2 | 42.23,18.15 41.72,18.65 41.72,19.03 42.61,19.92 | 42.61,19.92 43.12,20.43 X1.4 43.24,20.31 44.26,19.29 44.51,19.29 X1.2 | IC9.B1 43.62,28.18 43.62,28.43 IC9.C1 43.62,28.56 43.24,28.56 IC9.C2 43.12,28.56 42.86,28.56 IC9.C3 42.74,28.56 42.48,28.31 42.36,28.31 40.7,26.66
  Top 0.127: 40.07,22.84 40.07,23.1 40.58,23.61 C33.2 40.58,23.73 40.58,26.53 40.7,26.66 | 40.07,22.84 40.07,22.46 | 40.07,22.46 40.07,22.34 C5.2 | 40.07,22.84 39.43,23.48 39.43,23.61 C25.2 | 40.07,22.46 42.61,19.92 | C29.1 31.31,6.33 31.18,6.33 31.05,6.46 31.05,6.84 31.56,7.35 32.45,7.35 33.08,7.99 33.08,8.37 33.47,8.75 33.72,8.75 34.1,8.37 34.1,7.6 C14.2 34.1,7.48 34.61,6.97 34.61,6.84 | 34.61,6.84 34.61,6.46 C20.2 | 38.04,6.97 36.77,6.97 C9.2 | 38.55,6.46 38.04,6.97 | 38.16,4.81 38.16,6.08 38.55,6.46 | 38.16,4.81 38.16,4.05 C7.2 | 38.55,6.46 C12.2 | 38.55,7.73 38.55,7.48 38.04,6.97 | 38.55,7.73 38.55,7.86 C18.1 38.55,7.73 | 38.55,7.73 40.2,7.73 C2.2 40.32,7.6 42.61,7.6 44.39,9.38 44.39,11.29 | 38.16,4.81 35.62,4.81 | 34.61,6.84 35.37,6.84 35.62,6.59 35.62,4.81 | 35.62,4.81 SW_DN.1 | C4.2 41.47,8.49 41.47,8.37 41.72,8.11 42.23,8.11 43.75,9.64 C22.2 43.62,9.76 43.62,10.02 41.59,12.05 41.34,12.05 41.21,12.18 41.21,12.43 C11.2 41.09,12.56 40.96,12.69 | 40.45,12.69 39.94,12.18 39.56,12.18 38.67,11.29 37.53,11.29 C6.2 | 40.96,12.69 40.45,12.69 | 40.45,12.69 40.45,13.07 39.18,14.34 C10.2 39.18,14.84 36.13,14.84 36.01,14.72 35.75,14.72 | 44.39,11.29 43.5,11.29 41.85,12.94 | 44.39,11.29 45.15,11.29 C3.2 | 41.85,12.94 41.21,12.94 40.96,12.69 | 42.23,18.15 41.85,17.77 41.85,12.94 | 35.75,14.72 U1.P$B7 | 19.5,31.23 17.59,29.32 16.95,29.32 15.69,28.05 R3.1 | 19.5,31.23 19.5,31.99 J4.SH2 | 21.78,30.47 20.26,30.47 19.5,31.23 | 21.78,30.47 22.54,30.47 D1.2 | R2_USB.2 16.19,27.29 16.7,26.78 17.21,26.78 | 17.21,26.78 18.23,26.78 18.73,26.27 | 18.73,26.27 19.24,25.77 SJ1.1 18.73,26.27 | 22.8,23.61 23.43,23.61 R2_EP_DR.1
  Top 0.127: R1_USB.1 16.83,28.05 19.5,28.05 J4.SH4 | v22.8,22.97 22.8,23.61 | 22.8,23.61 C1-EP-DR.2 | 20,27.54 19.62,27.92 J4.SH4 | 20,27.54 20.13,27.42 20.64,27.42 J4.A12_B1 | 20,27.54 18.73,26.27 | 20,27.54 J4.SH4 | IC2.B3 11.37,32.62 12.51,32.62 13.27,33.39 13.53,33.39 U3.6 13.65,33.39 14.42,33.39 14.54,33.26 U3.9 | 15.18,32.5 15.56,32.5 U3.1 | 15.18,32.5 14.54,33.13 U3.9 | U3.9 14.67,33.26 15.3,33.89 15.56,33.89 U3.4 15.69,33.89 26.48,33.89 26.99,33.39 | 12.13,28.43 12.13,29.07 C42.2 12.13,29.19 13.4,29.19 15.18,30.97 15.18,32.5 | 12.13,28.43 12.13,27.8 11.62,27.29 11.37,27.29 11.11,27.54 11.11,27.67 C32.1 | IC2.B1 10.22,32.5 9.59,31.86 9.59,30.34 9.72,30.21 9.72,29.45 C19.2 9.72,29.32 9.72,28.56 C43.2 9.72,28.43 12.13,28.43 | 29.78,30.59 30.16,30.59 TP2.TP | 29.78,30.59 28.39,31.99 J4.SH1 28.26,32.12 26.99,33.39 | 29.78,30.59 29.78,29.45 28.39,28.05 J4.SH3 28.26,27.92 27.75,27.92 27.24,27.42 J4.A1_B12 27.12,27.29 27.12,25.89 24.83,23.61 R_TYPE_SEL.1 | 29.78,30.59 TP2.TP | 21.78,30.47 21.78,31.73 22.8,32.75 26.35,32.75 26.99,33.39 | 11.24,19.92 10.86,19.54 10.48,19.54 10.22,19.8 10.22,20.05 EPD_C7.1 | 11.24,19.92 11.24,20.81 EPD_C8.1 11.24,20.94 11.24,21.19 11.11,21.32 | 11.11,21.32 10.73,21.32 10.22,21.83 10.22,22.08 EPD_C10.1 | J1.MP2 11.11,23.99 11.11,22.72 EPD_C11.1 11.11,22.59 11.11,21.32 | EPD_C12.1 9.21,23.35 9.21,23.48 9.72,23.99 10.99,23.99 J1.MP2 | 12.51,18.65 12.51,18.15 EPD_C5.1 12.51,18.02 12.51,17.77 14.42,15.86 | 12.51,18.65 12.51,18.78 12.89,19.16 13.27,19.16 14.16,20.05 14.16,20.18 C23.2 | 14.42,15.86 14.92,15.86 C24.1 15.05,15.73 15.43,16.11 15.43,16.62 18.86,20.05 D4.1
  Top 0.127: 12.51,18.65 11.24,19.92 | C21.2 28.51,8.11 28.13,8.49 28.13,9 28.39,9.26 28.39,11.67 C8.2 28.39,11.8 28.39,12.81 27.62,13.57 26.73,13.57 24.45,11.29 24.45,7.73 23.56,6.84 | 23.56,6.84 23.18,6.84 23.05,6.72 23.05,6.46 C31.1 | 23.56,6.84 24.57,5.83 24.57,4.94 SW_ENT.1 24.57,4.81 22.04,2.27 18.48,2.27 18.1,2.65 TP_GND.TP 18.1,2.78 16.07,2.78 14.16,4.68 13.65,4.68 SW_UP.1 13.53,4.81 13.53,6.33 13.02,6.84 12.26,6.84 | 8.19,27.16 8.57,27.54 9.21,27.54 C27.1 | 8.19,27.16 8.07,27.04 8.07,26.91 C34.1 | 8.07,19.8 7.56,20.31 7.56,23.61 7.68,23.73 7.68,25.89 EPD_C9.1 7.68,26.02 4.64,26.02 4.13,26.53 4.13,27.54 4.26,27.67 7.68,27.67 8.19,27.16 | 8.07,19.8 8.32,19.8 J1.17 | 12.26,6.84 12,6.59 12,6.46 C30.1 | 10.48,11.54 10.99,11.03 J1.MP1 11.11,10.91 12.26,9.76 12.26,6.84 | 10.48,11.54 9.97,12.05 EPD_C2.1 | 10.48,11.54 13.15,14.21 | 13.15,14.21 11.37,15.99 10.86,15.99 10.73,15.86 10.73,15.61 EPD_C1.1 10.61,15.48 8.95,15.48 8.83,15.35 8.45,15.35 J1.8 8.32,15.35 8.07,15.35 7.81,15.61 7.81,19.54 8.07,19.8 | 14.42,15.86 14.42,14.21 13.91,13.7 13.65,13.7 13.15,14.21 | 13.15,14.21 EPD_C6.1 | 17.21,26.78 17.21,26.15 16.83,25.77 15.18,25.77 13.53,24.12 11.11,24.12 J1.MP2 | 40.7,26.66 36.89,30.47 30.29,30.47 TP2.TP
  Bottom 0.127: J2.3 20.77,13.32 20.77,12.18 J2.5 20.77,12.05 21.15,12.05 22.04,11.16 30.93,11.16 U1.P$90 | U1.P$79 33.59,15.1 33.97,15.48 v33.97,16.88 33.21,16.88 32.2,17.89 32.2,18.27 | 32.2,18.27 v32.2,20.56 | v37.15,18.78 35.88,18.78 34.86,17.77 34.35,17.77 33.85,18.27 32.2,18.27 | v22.8,22.97 22.04,22.97 18.23,26.78 18.23,27.04 19.11,27.92 19.5,27.92 J4.SH4 19.62,28.05 19.62,31.99 J4.SH2
  pour Route2: -0.16,-1.84 46.72,-1.84 46.72,34.88 45.5,36.1 -1.38,36.1 -1.38,-0.62
IMU_INT1  (via drill 0.3)
  Top 0.127: v32.45,17 32.7,16.75 32.7,16.49 U1.P$N1 | v30.67,21.57 30.67,21.32 30.93,21.07 31.18,21.07 IC3.5
  Route2 0.127: v32.45,17 32.45,17.38 31.56,18.27 31.56,19.67 31.56,20.69 v30.67,21.57
IMU_INT2  (via drill 0, 0.01)
  Top 0.008: v31.19,19.3 30.87,19.64 30.87,20.14 IC3.6
  Route15 0.008: U1.P$P2 31.56,16.89
  Route15 0.152: 31.56,16.89 31.56,18.93 v31.19,19.3 31.15,19.34
  other vias: 32.48,15.97
LX1
  Top 0.127: IC9.B2 43.24,28.18 42.86,28.18 IC9.B3 42.74,28.05 42.48,28.05 41.09,26.66 41.09,24.24 42.1,23.23 L7.1
LX2
  Top 0.127: IC9.D2 43.12,28.94 42.86,28.94 IC9.D3 42.74,28.94 41.34,28.94 40.96,29.32 40.96,29.83 42.1,30.97 43.12,30.97 44.26,29.83 44.26,23.23 L7.2
N$1  (via drill 0.3)
  Top 0.127: 22.54,24.75 22.42,24.88 22.04,24.88 21.15,23.99 21.15,23.35 Q3.3 18.48,23.35 17.08,24.75 16.45,24.75 D5.2 | 22.54,24.75 22.67,24.62 22.67,24.37 C2-EP-DR.2 | v22.8,25 22.54,24.75 | v29.66,25.89 30.16,25.89 30.93,26.66 L5.1
  Bottom 0.127: v22.8,25 24.07,25 24.96,25.89 v29.66,25.89
N$2
  Top 0.127: C2-EP-DR.1 22.16,24.37 21.91,24.12 21.91,22.72 22.04,22.59 22.04,22.34 20.64,20.94 20.64,18.91 21.02,18.53 21.27,18.53 22.42,19.67 22.42,20.05 D4.2 22.54,20.18 24.45,20.18 D2.1
N$3  (via drill 0.3)
  Top 0.127: v21.91,21.19 21.91,21.45 23.43,22.97 R2_EP_DR.2 | v19.24,21.19 18.61,21.19 15.56,24.24 15.56,25.38 15.69,25.51 17.46,25.51 18.86,24.12 Q3.1
  Bottom 0.127: v19.24,21.19 v21.91,21.19
N$4  (via drill 0.3)
  Top 0.127: v25.34,22.21 24.83,22.72 24.83,22.97 R_TYPE_SEL.2 | R1_EP_DR.1 24.07,23.61 v23.56,24.12 23.56,24.88 22.8,25.64 20.89,25.64 SJ1.2
  Bottom 0.127: v25.34,22.21 25.97,22.21 26.48,22.72 26.48,23.99 25.34,25.13 24.57,25.13 v23.56,24.12
N$5  (via drill 0.3)
  Top 0.127: v10.22,28.94 10.35,29.07 11.75,29.07 C42.1 | v8.7,28.94 9.08,28.56 C43.1
  Bottom 0.127: v8.7,28.94 v10.22,28.94
N$6
  Top 0.127: C32.2 11.49,27.8 11.49,27.92 11.37,28.05 8.83,28.05 8.19,28.69 8.19,31.48 10.1,33.39 10.48,33.39 10.73,33.13 IC2.A2
N$7
  Top 0.127: IC1.D1 30.04,17.77 29.66,17.77 28.64,16.75 26.61,16.75 R9.2
N$8  (via drill 0.3)
  Top 0.127: v18.73,26.91 18.23,27.42 16.83,27.42 R1_USB.2 | v24.96,26.4 25.21,26.66 25.21,27.29 J4.A5
  Bottom 0.127: v18.73,26.91 18.99,26.91 20,25.89 24.45,25.89 v24.96,26.4
N$9  (via drill 0.3)
  Top 0.127: v16.7,26.27 15.69,27.29 15.69,27.42 R3.2 | v33.34,21.45 32.83,21.45 IC3.1
  Route2 0.127: v16.7,26.27 17.59,26.27 17.72,26.4 18.35,26.4 19.11,25.64 27.5,25.64 31.69,21.45 v33.34,21.45
N$10
  Top 0.127: EPD_C2.2 10.48,12.94 10.1,13.32 8.45,13.32 J1.4
N$11
  Top 0.127: EPD_C1.2 11.11,15.48 11.11,15.35 9.59,13.83 8.45,13.83 J1.5
N$12  (via drill 0.09, 0.3)
  Top 0.127: v41.59,24.62 44.01,27.04 44.01,28.56 43.62,28.94 IC9.D1 | v33.34,18.88 33.57,18.65 33.97,18.65 34.35,19.03 R4.2
  Route2 0.127: v41.59,24.62 37.78,20.81 35.75,20.81 33.82,18.88 v33.34,18.88
N$13
  Top 0.127: IC9.E1 43.62,29.32 43.62,29.83 42.99,30.47 R2.2
N$14
  Top 0.127: R2_USB.1 16.19,28.05 17.21,29.07 19.11,29.07 19.37,29.32 21.15,29.32 22.16,28.31 22.16,27.42 J4.B5
N$17  (via drill 0.3)
  Top 0.127: v30.16,14.72 30.16,15.22 U1.P$AC5 | v27.37,11.92 27.37,10.65 25.34,8.62 25.34,5.7 28.64,2.4 29.91,2.4 31.43,3.92 31.43,5.32 32.32,6.21 34.1,6.21 34.35,5.95 34.99,5.95 35.12,6.08 35.12,6.33 C20.1
  Bottom 0.127: v27.37,11.92 v30.16,14.72
N$19
  Top 0.127: EPD_C6.2 13.78,15.22 8.83,20.18 8.45,20.18 J1.18
N$21
  Top 0.127: EPD_C7.2 10.61,20.05 10.61,20.31 10.22,20.69 8.45,20.69 J1.19
N$22
  Top 0.127: EPD_C8.2 10.73,20.94 9.08,20.94 8.83,21.19 8.45,21.19 J1.20
N$24
  Top 0.127: EPD_C10.2 10.61,22.21 10.61,22.34 10.35,22.59 9.72,22.59 9.34,22.21 8.45,22.21 J1.22
N$26  (via drill 0.3)
  Top 0.127: v10.22,23.35 9.72,23.35 EPD_C12.2 | v9.08,23.99 8.45,23.35 J1.24
  Bottom 0.127: v10.22,23.35 9.72,23.35 v9.08,23.99
N$46
  Top 0.127: U1.P$N24 32.7,9.89 33.59,9 34.1,9 36.64,6.46 C9.1
N$49  (via drill 0.3)
  Top 0.127: v35.75,9.26 34.99,9.26 34.35,9.89 34.35,10.02 33.97,10.4 U1.P$H23 | v40.83,11.29 40.2,11.29 L1.1 | v44.13,11.8 45.15,11.8 C3.1
  Bottom 0.127: v35.75,9.26 38.42,11.92 40.2,11.92 v40.83,11.29 41.34,11.8 v44.13,11.8
N$51  (via drill 0.3)
  Top 0.127: v37.02,9.76 36.89,9.76 36.26,10.4 U1.P$A23 | v38.93,7.1 40.2,7.1 C2.1 | v44.51,21.19 44.51,20.43 X1.3
  Bottom 0.127: v37.02,9.76 37.02,9.26 37.66,8.62 37.66,8.37 v38.93,7.1 40.07,7.1 44.64,11.67 44.64,11.92 44.26,12.3 43.75,12.3 41.85,14.21 41.85,17.64 44.51,20.31 v44.51,21.19
N$52  (via drill 0.3)
  Top 0.127: v37.15,8.49 35.75,9.89 U1.P$B24 | 42.74,18.78 v42.23,18.78 | 42.74,18.78 43.12,19.16 X1.1 | 42.74,18.78 43.24,18.27 43.24,18.15 C1.1
  Route2 0.127: v37.15,8.49 39.43,10.78 39.69,10.78 40.07,11.16 40.07,11.8 39.94,11.92 39.94,16.49 v42.23,18.78
N$58  (via drill 0.3)
  Top 0.127: v37.15,12.05 36.26,12.05 U1.P$A18 | v38.8,18.78 38.8,19.29 C13.1
  Bottom 0.127: v37.15,12.05 37.15,12.3 38.8,13.95 v38.8,18.78
N$69  (via drill 0.3)
  Top 0.127: v37.91,16.62 37.02,15.73 35.75,15.73 U1.P$B3 | v37.91,20.18 36.64,18.91 36.64,18.78 36.13,18.27 35.88,18.27 L2.1
  Bottom 0.127: v37.91,20.18 v37.91,16.62
N$70
  Top 0.127: L2.2 35.88,19.29 35.88,20.69 37.53,22.34 37.91,22.34 L3.1
OUT+
  Top 0.127: IC2.A3 11.24,33.13 10.73,33.64 7.3,33.64 TP_OP.TP
OUT-
  Top 0.127: IC2.C3 11.37,31.99 11.62,31.99 12.76,30.85 TP_ON.TP
P0.00/XL1  (via drill 0.3)
  Top 0.127: 36.51,16.62 37.4,17.51 37.4,18.15 C17.2 | 36.51,16.62 36.01,16.11 35.62,16.11 35.5,15.99 34.99,15.99 U1.P$D2 | v36.89,13.45 37.27,13.07 38.8,13.07 X2.2 | 36.51,16.62 v36.89,16.24
  Bottom 0.127: v36.89,16.24 v36.89,13.45
P0.01/XL2  (via drill 0.3)
  Top 0.127: v34.73,16.37 34.73,16.24 34.48,15.99 U1.P$F2 | v39.43,11.41 39.43,11.16 38.8,10.53 X2.1 | v38.16,8.49 38.16,7.99 C18.2
  Route2 0.127: v34.73,16.37 37.02,14.08 37.15,14.08 39.43,11.8 v39.43,11.41
  Bottom 0.127: v38.16,8.49 38.16,10.14 v39.43,11.41
P0.13/1.5D  (via drill 0.3)
  Top 0.127: SW_UP.2 10.73,4.81 10.73,5.06 11.37,5.7 11.88,5.7 12.26,6.08 12.26,6.33 C30.2 12.38,6.33 v12.89,6.33 | v25.97,23.73 25.85,23.61 25.46,23.61 R5.1
  Route2 0.127: v25.97,23.73 21.78,19.54 21.78,18.78 19.11,16.11 19.11,12.18 13.27,6.33 v12.89,6.33
P0.14/1.5D
  Top 0.127: 22.67,5.83 22.42,5.83 21.78,5.19 21.78,4.94 SW_ENT.2 | 22.67,5.83 22.92,5.83 23.3,6.21 23.3,6.46 C31.2 | 22.67,5.83 22.67,6.72 24.19,8.24 24.19,18.27 27.12,21.19 27.12,21.7 R8.1
P1.01/1.6C  (via drill 0.3)
  Top 0.127: v12.51,22.46 13.4,21.57 14.8,21.57 R_PWR_EPD.1 | v9.34,25.64 8.57,26.4 7.3,26.4 7.18,26.27 5.53,26.27 4.89,26.91 DMG2305UX-7.1
  Bottom 0.127: v9.34,25.64 v12.51,22.46
P1.02/1.6C  (via drill 0.3)
  Top 0.127: v31.94,6.84 31.81,6.72 31.43,6.72 C29.2 | v32.45,5.7 32.45,4.94 32.58,4.81 SW_DN.2 | v24.45,24.12 24.57,24.24 24.57,25.77 R7.1
  Route15 0.127: v24.45,24.12 24.45,16.37 31.94,8.88 v31.94,6.84
  Bottom 0.127: v31.94,6.84 31.94,6.21 v32.45,5.7
P1.09  (via drill 0.3)
  Top 0.127: v33.47,10.4 33.47,10.27 33.21,10.02 U1.P$L24 | v32.96,17.77 32.58,17.77 31.94,17.13 31.94,16.75 32.2,16.49 U1.P$R1
  Bottom 0.127: v33.47,10.4 34.61,10.4 35.5,11.29 35.5,16.24 33.97,17.77 v32.96,17.77
PMIC_INT  (via drill 0, 0.2)
  Top 0.152: v30.04,19.42 arc-90 30.07,19.39 IC1.A1
  Route2 0.152: U1.P$T2 arc-90 30.32,17.63 30.32,19.37 arc90 30.27,19.42 v30.04,19.42
  other vias: 31.98,15.97
PREVGH
  Top 0.127: 9.21,25 9.34,24.88 12.76,24.88 D5.1 | 9.21,25 8.32,25.89 EPD_C9.2 | 9.21,25 9.21,24.88 7.81,23.48 7.81,22.08 8.07,21.83 8.32,21.83 J1.21
PREVGL  (via drill 0.3)
  Top 0.127: v11.62,22.08 11.62,22.59 EPD_C11.2 | v9.21,22.72 8.45,22.72 J1.23 | v26.1,19.54 26.61,20.05 27.88,20.05 D2.2
  Bottom 0.127: v9.21,22.72 9.84,22.08 v11.62,22.08 14.16,19.54 v26.1,19.54
RESE  (via drill 0.3)
  Top 0.127: v23.56,22.46 24.07,22.97 R1_EP_DR.2 | 19.75,22.46 19.11,22.46 18.99,22.59 Q3.2 | 19.75,22.46 v21.53,22.46 | v9.21,12.81 8.45,12.81 J1.3 | v17.21,17.77 17.84,17.77 19.75,19.67 19.75,22.46
  Bottom 0.127: v21.53,22.46 v23.56,22.46 | v9.21,12.81 12.26,12.81 v17.21,17.77
RESET  (via drill 0.2, 0.3)
  Top 0.127: v19.88,10.14 19.88,7.35 19.11,6.59 TP_RESET.TP
  Route2 0.152: v19.88,10.14 arc-90 20.77,9.26 20.77,8.44 22.59,8.44 arc90 25.13,10.98 25.13,14.61 28.56,14.61 28.59,14.61 28.84,14.61 arc-90 U1.P$AC13
  Bottom 0.127: v19.88,10.14 19.88,11.29 19.5,11.67 19.5,12.05 J2.6
  other vias: 30.23,13.22
RF  (via drill 0.3)
  Top 0.127: 42.1,8.75 43.12,9.76 C22.1 | 42.1,8.75 41.97,8.62 C4.1 | 40.58,10.27 40.2,10.27 L1.2 | 42.1,8.75 40.58,10.27 | v40.83,14.72 40.83,15.99 ANT1.1 | v40.58,12.18 41.34,11.41 41.34,11.03 40.58,10.27
  Bottom 0.127: v40.83,14.72 40.83,12.43 v40.58,12.18
SCL/1.4C
  Top 0.127: IC2.C1 9.84,31.61 9.84,31.35 11.62,29.58 12.51,29.58 12.64,29.45 13.27,29.45 14.03,30.21 14.03,31.35 13.4,31.99 13.27,31.99 13.02,32.24 13.02,32.62 13.27,32.88 13.53,32.88 U3.7
SCL/2.4C  (via drill 0.09, 0.2, 0.3)
  Top 0.127: 33.34,20.94 33.47,20.94 33.85,21.32 33.85,22.08 33.08,22.84 TP_SCL.TP | 33.34,20.94 32.83,20.94 IC3.12 | v29.53,18.86 29.73,18.65 30.04,18.65 IC1.B1 | v26.86,13.07 27.37,13.07 R17.2 | v33.85,19.8 33.85,19.16 R4.1 33.67,19.24 v32.75,19.24 | v33.34,20.56 33.34,20.94
  Route2 0.127: U1.P$M2 32.98,16.82 33.62,17.46 33.69,17.46 33.69,18.42 32.6,18.42 32.5,18.53 32.5,18.98 v32.75,19.24
  Bottom 0.127: v26.86,13.07 29.78,15.99 29.78,18.15 29.53,18.4 v29.53,18.86 29.4,18.98 29.4,20.31 30.16,21.07 32.32,21.07 33.08,20.31 | v33.85,19.8 33.59,19.8 33.08,20.31 | 33.08,20.31 v33.34,20.56
  other vias: 32.98,15.97
SDA/1.4C  (via drill 0.2)
  Top 0.152: v14.36,31.89 14.15,31.89 arc-90 U3.8
  Bottom 0.152: IC2.B2 arc90 11.09,32.24 12.64,32.24 arc-90 12.89,31.99 12.89,31.94 arc90 12.94,31.89 v14.36,31.89
  other vias: 10.78,32.55
SDA/2.4C  (via drill 0.3)
  Top 0.127: R18.2 15.05,27.54 14.42,27.54 14.03,27.92 14.03,28.18 16.32,30.47 17.08,30.47 TP_SDA.TP 17.08,31.1 19.24,33.26 v26.1,33.26 | v31.94,22.08 32.2,21.83 32.2,21.57 IC3.2 | U1.P$L1 33.21,16.49 33.21,17.38 34.73,18.91 v34.73,20.69 v37.15,23.1 | v29.27,18.02 29.4,18.15 30.04,18.15 IC1.C1 | v42.23,29.96 42.23,30.47 R2.1
  Bottom 0.127: v34.73,20.69 33.34,22.08 v31.94,22.08 30.54,22.08 29.02,20.56 29.02,18.78 29.27,18.53 v29.27,18.02 | v37.15,23.1 42.23,28.18 v42.23,29.96 38.93,33.26 v26.1,33.26
SWDCLK  (via drill 0.3)
  Top 0.127: v30.42,9.51 30.42,9.64 30.67,9.89 U1.P$AA24 | v17.34,8.37 TP_SWDCLK.TP
  Bottom 0.127: v30.42,9.51 21.27,9.51 20.64,10.14 | 20.64,10.14 20.13,10.65 20.13,12.69 19.5,13.32 J2.4 | v17.34,8.37 18.86,8.37 20.64,10.14
SWDIO  (via drill 0.3)
  Top 0.127: 30.16,9.13 30.67,8.62 31.81,8.62 TP_SWDIO.TP | 30.16,9.13 29.91,9.38 29.91,9.76 30.16,10.02 U1.P$AC24 | 30.16,9.13 v29.78,8.75
  Bottom 0.127: v29.78,8.75 28.89,7.86 17.21,7.86 15.94,9.13 15.94,13.32 16.95,14.34 17.97,14.34 18.23,14.59 19.37,14.59 J2.2
SWO
  Top 0.127: U1.P$AD22 29.78,10.91 30.16,10.53 30.16,10.4 29.27,9.51 29.27,3.92 TP_SWO.TP
VBAT/1.2A
  Top 0.127: U3.3 15.69,33.39 15.69,33 U3.2 15.69,32.88 15.94,32.88 16.19,32.62 16.19,31.35 13.27,28.43 13.27,26.66 TP1.TP 11.62,26.66 10.73,27.54 9.59,27.54 C27.2
VBAT/2.5C  (via drill 0.2, 0.3)
  Top 0.127: v30.93,18.15 30.54,18.15 IC1.C2 | v29.91,20.18 29.73,20.18 C37.2
  Bottom 0.127: v30.93,18.15 30.93,19.16 v29.91,20.18
VBUS/1.5D  (via drill 0.3)
  Top 0.127: v22.04,26.4 21.65,26.78 21.65,27.29 J4.A9_B4 | v25.85,26.4 26.23,26.78 26.23,27.29 J4.A4_B9 26.23,27.42 26.1,27.54 26.1,29.7 25.46,30.34 25.21,30.34 D1.5
  Bottom 0.127: v22.04,26.4 24.32,26.4 24.83,26.91 25.34,26.91 v25.85,26.4
VBUS/2.6D
  Top 0.127: 28.39,18.78 28.89,19.29 28.89,19.8 29.78,20.69 30.04,20.69 30.42,20.31 30.42,19.03 IC1.A2 | 28.39,18.78 28.39,18.27 C38.1 | 28.89,15.22 29.66,15.99 U1.P$AD2 | 28.89,15.22 28.89,9.89 28.64,9.64 28.64,8.88 C21.1 | 28.39,18.78 26.86,18.78 25.85,17.77 25.85,16.24 26.86,15.22 28.89,15.22
VREG  (via drill 0.3)
  Top 0.001: 30.7,20.91 30.7,18.68
  Top 0.127: C23.1 13.78,20.31 13.78,20.43 14.03,20.69 14.29,20.69 v14.92,20.05 14.92,16.37 C24.2 | IC9.A1 43.62,27.67 43.24,27.67 IC9.A2 43.12,27.67 42.86,27.67 IC9.A3 42.74,27.67 v41.59,26.53 | 30.7,18.68 30.54,18.53 IC1.B2 | 30.16,21.45 30.7,20.91 | 30.16,21.45 30.16,22.84 TP_VREG.TP | v27.75,17.77 27.12,17.77 C39.1 | 30.16,21.45 29.66,20.94 v28.77,20.94 v27.5,20.94
  Route15 0.127: v41.59,26.53 37.27,26.53 31.69,20.94 v28.77,20.94
  Bottom 0.127: v27.75,17.77 27.75,19.92 v28.77,20.94 | v14.92,20.05 26.61,20.05 v27.5,20.94